# Altium PCB imped50.PcbDoc
Units mm, origin at the board's own origin, x right, y up, seen from the top; angles counter-clockwise.
Board outline 69.9 x 99.85 mm, 4 copper layers (Top Layer, InternalGND, Internal3V3, Bottom Layer), stack 1.563 mm thick; 2 components, 104 nets, 0 pads, 0 vias.
Unrouted connection lines stored in the file: 3.
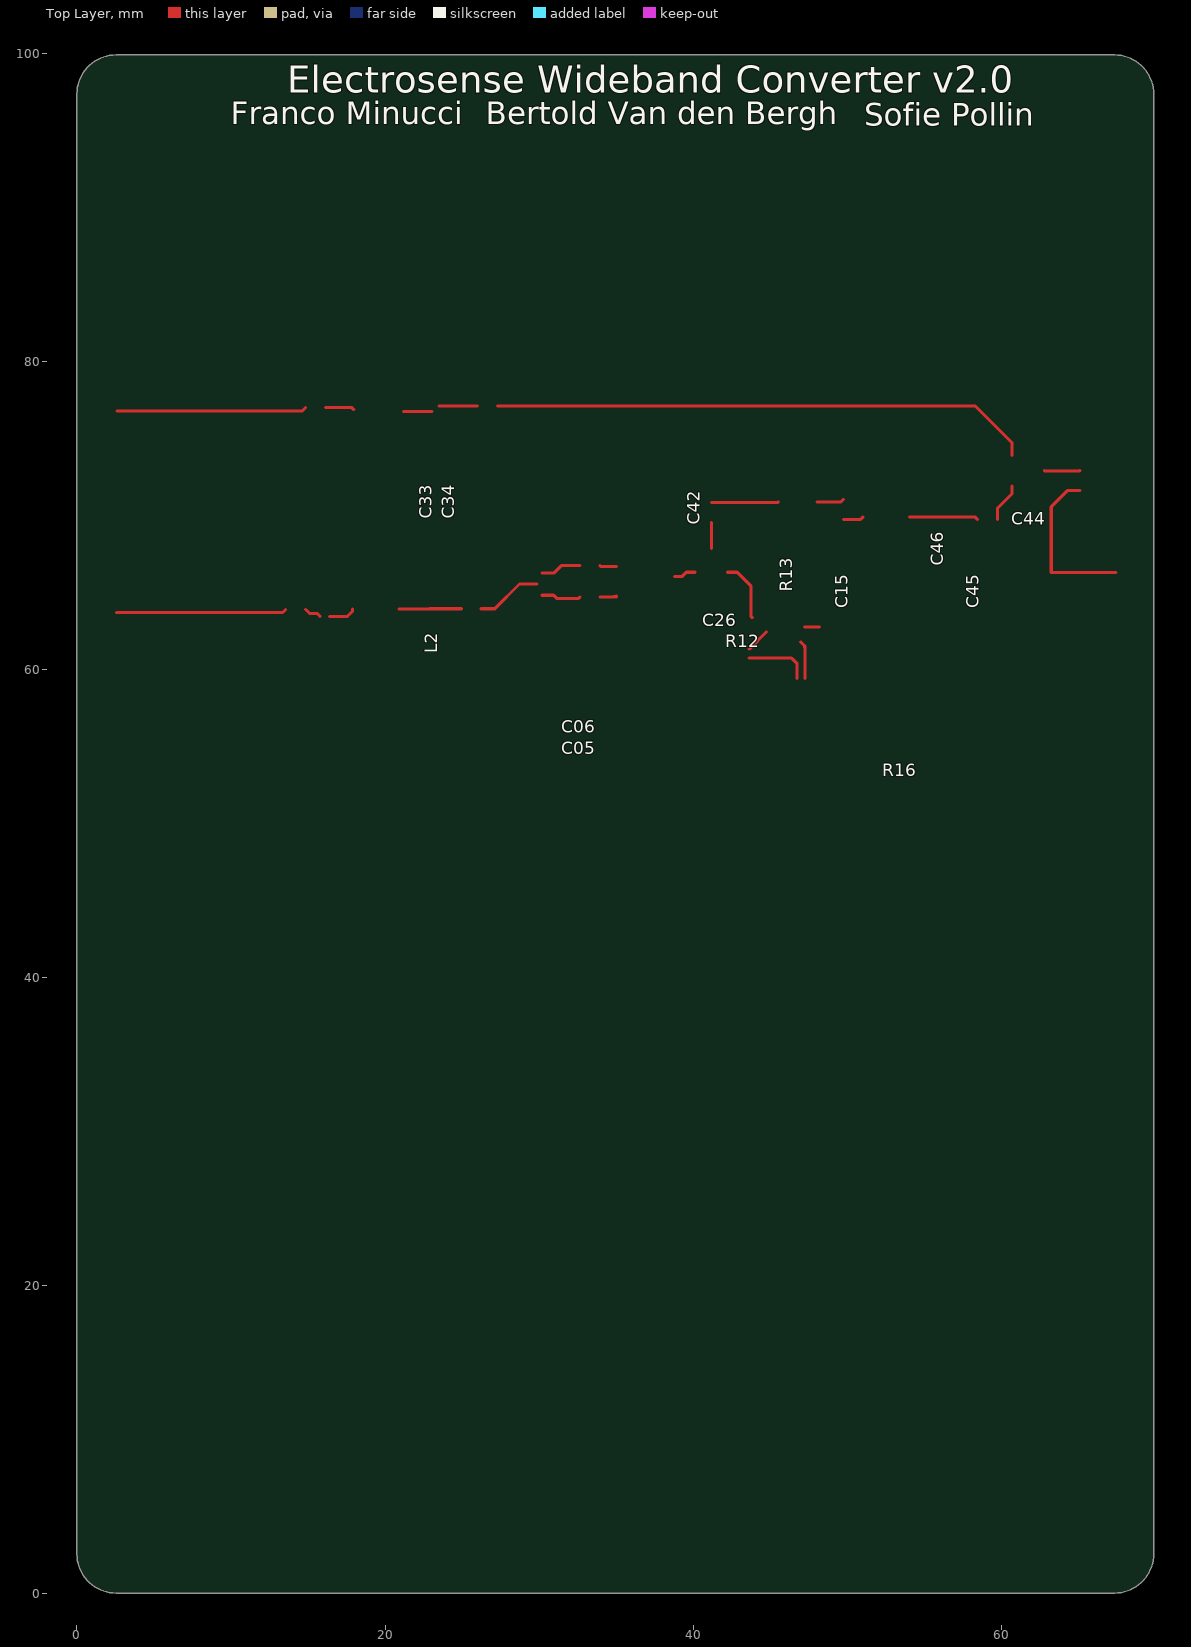
[diagram p0: Top Layer view]
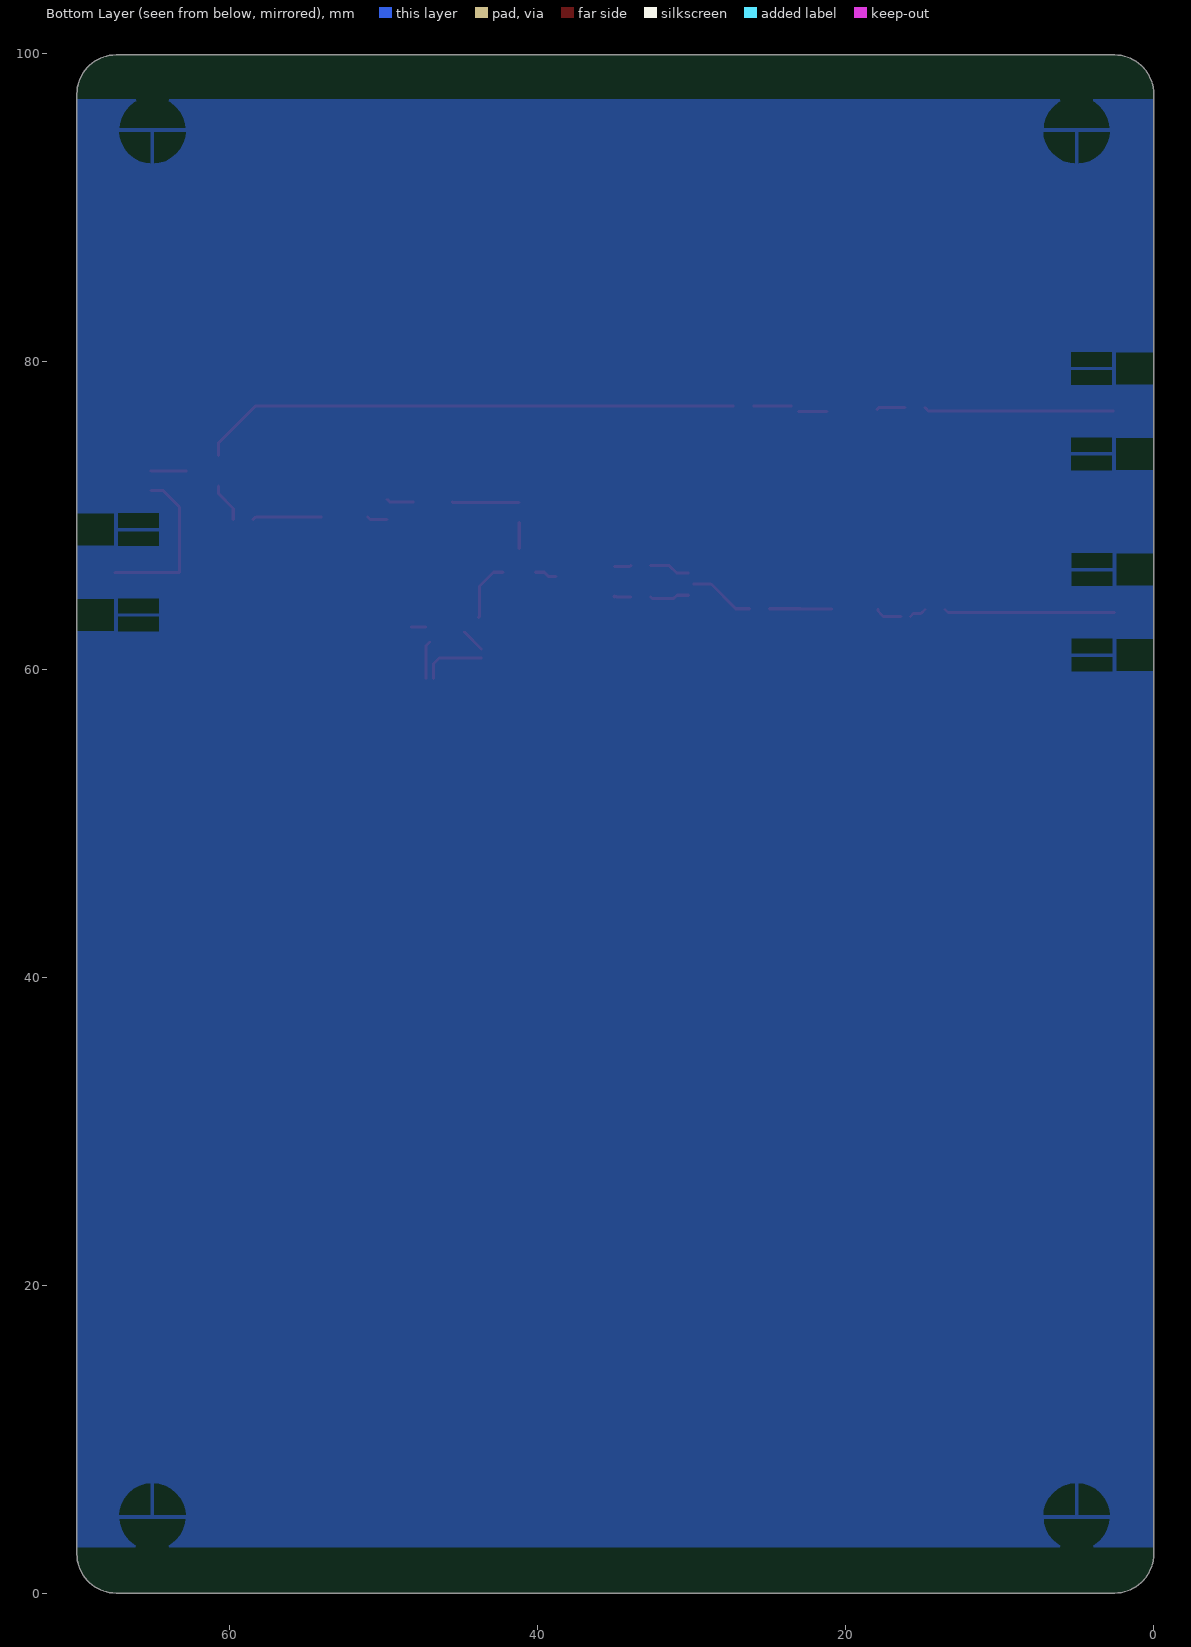
[diagram p1: Bottom Layer view, seen from below]
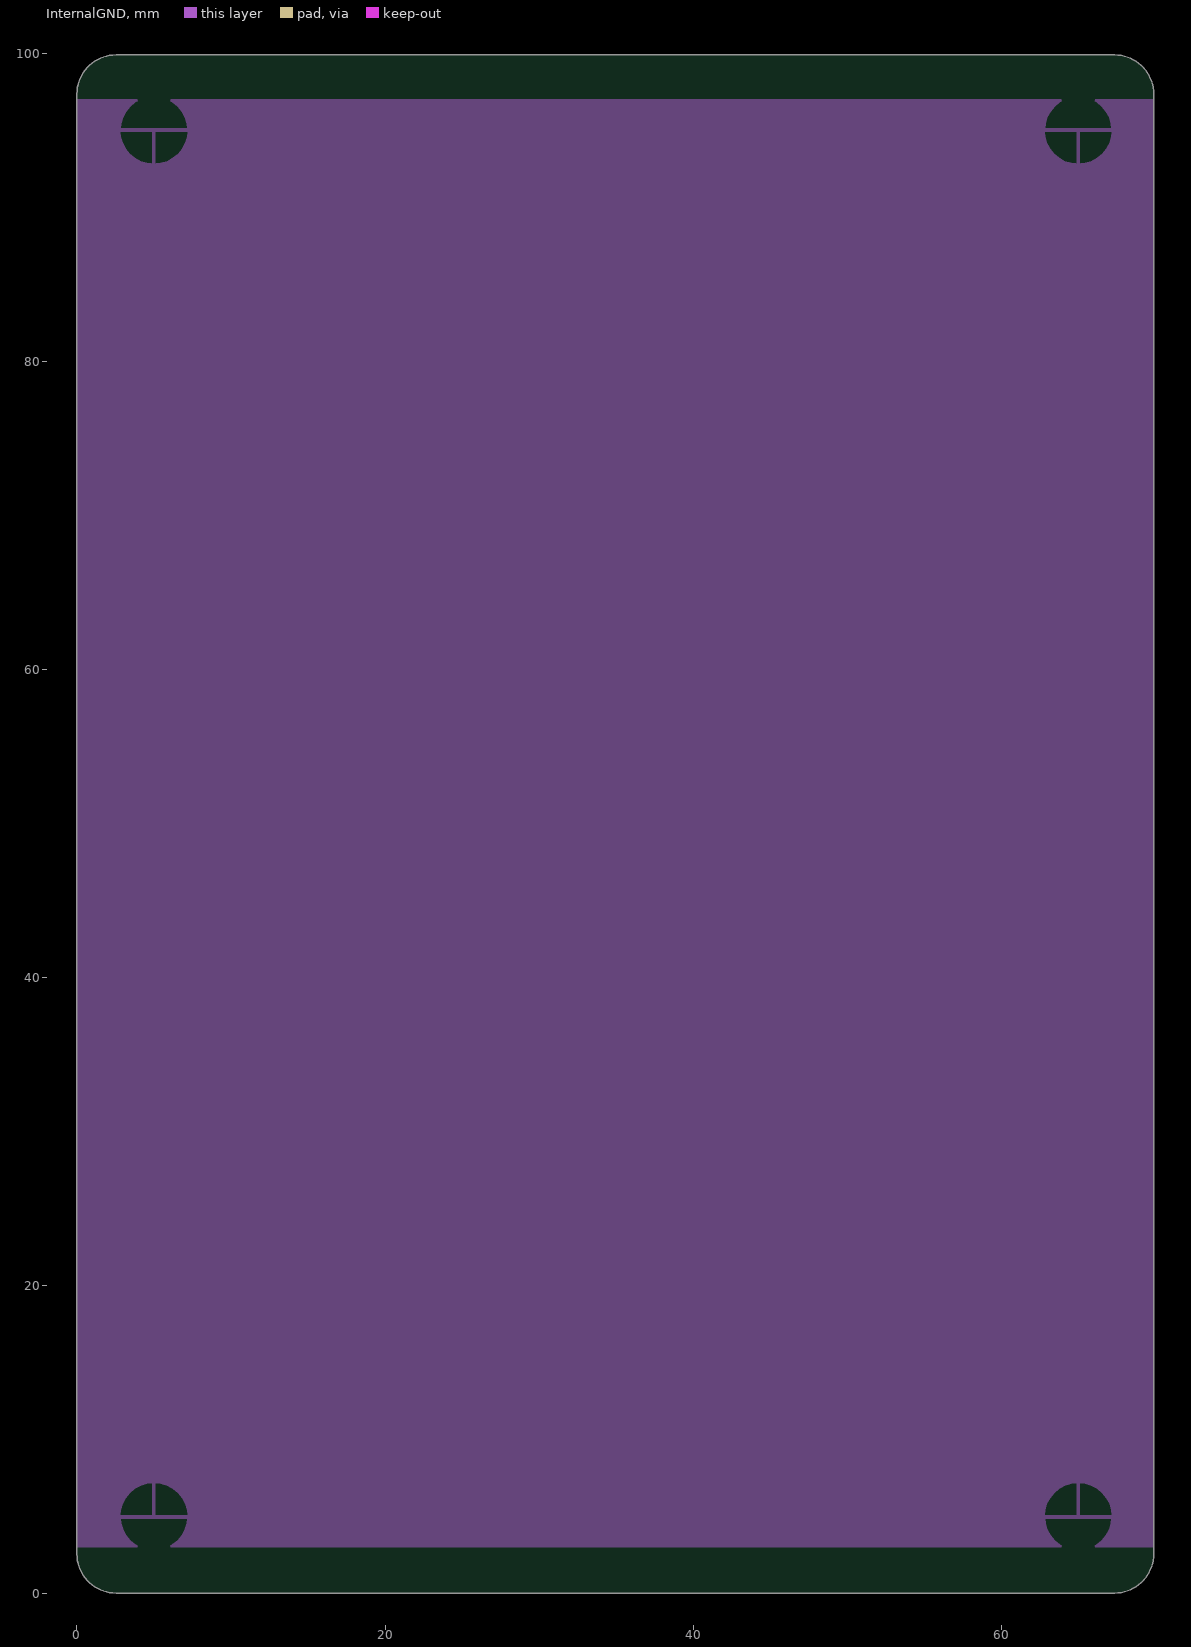
[diagram p2: InternalGND]
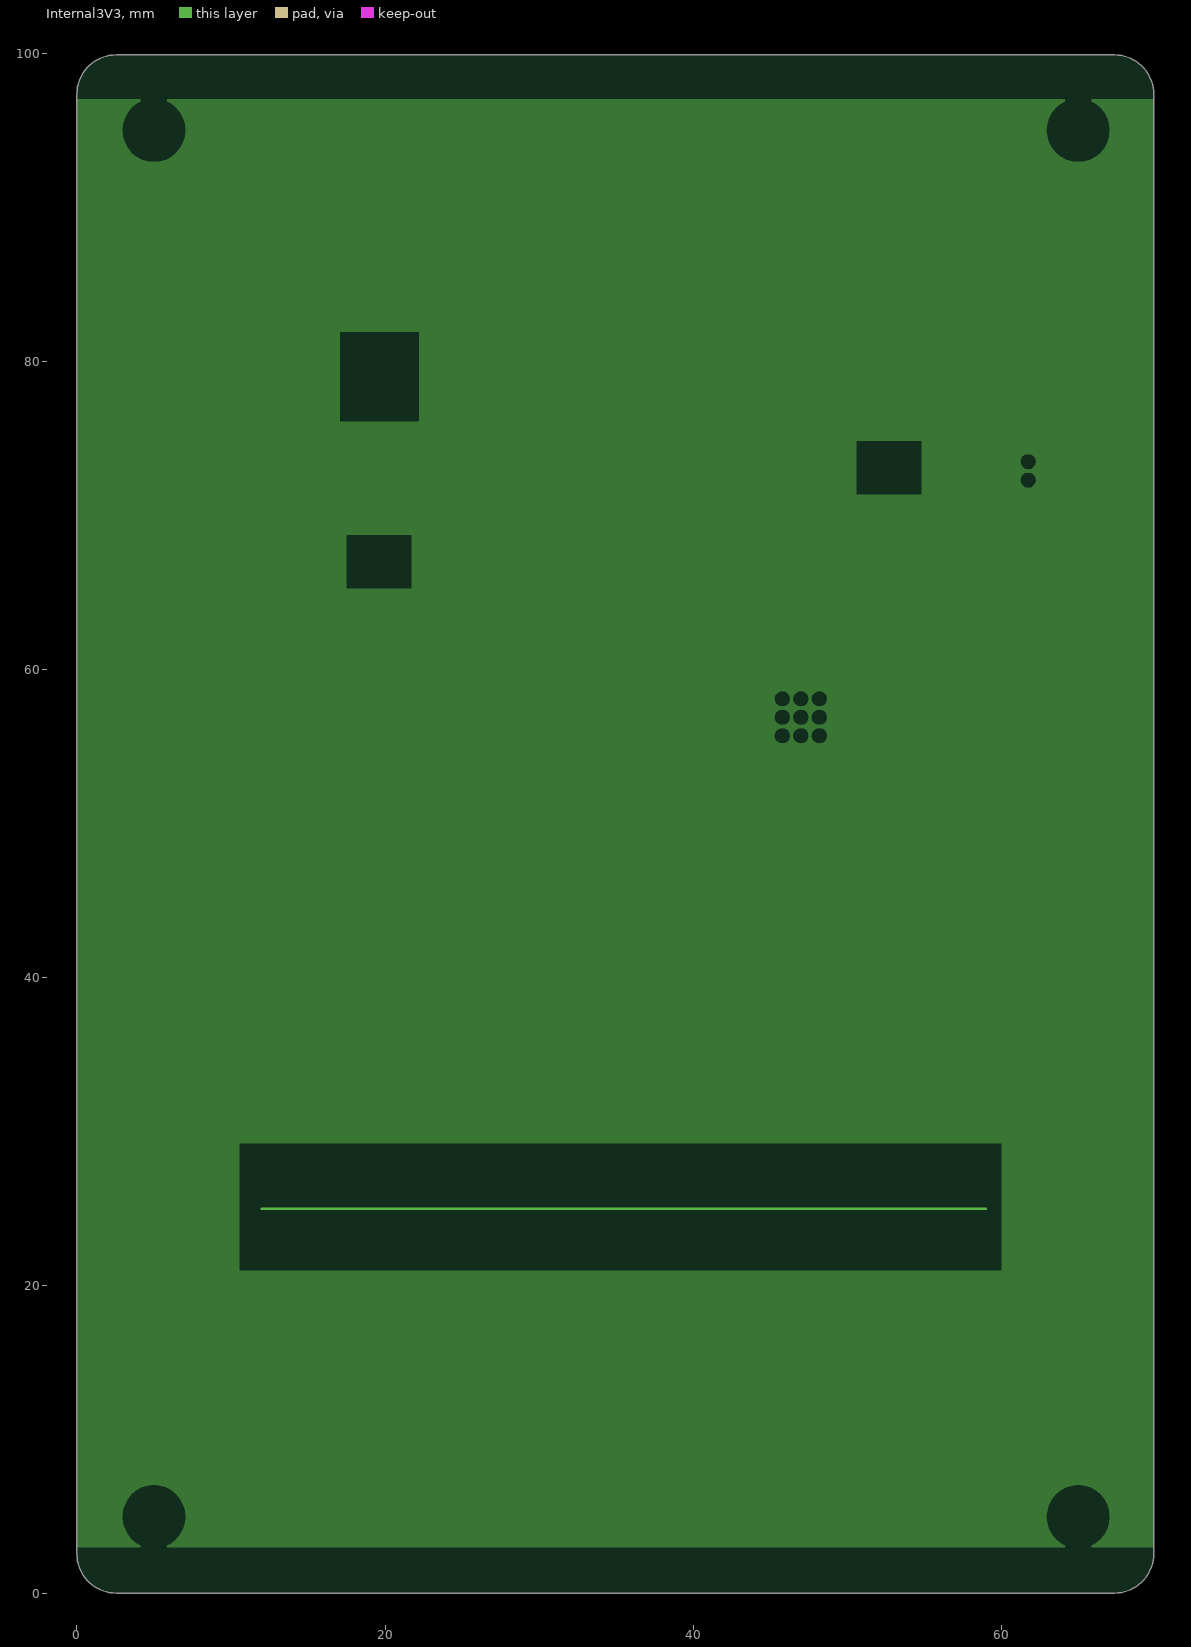
[diagram p3: Internal3V3]

## Layer stack, top to bottom
Top Solder: solder mask 0.0102, Solder Resist, Dk 3.5
Top Layer: signal copper 0.0356
Dielectric1: core 0.11, FR-4, Dk 4.29
InternalGND: signal copper 0.036
Dielectric5: prepreg 1.2, FR-4, Dk 3.96
Internal3V3: signal copper 0.036
Dielectric6: core 0.11, FR-4, Dk 4.29
Bottom Layer: signal copper 0.0356
Bottom Solder: solder mask 0.0102, Solder Resist, Dk 3.5

## Board outline
0,97.349 cw(c2.54,97.349) 2.54,99.889 67.36,99.889 cw(c67.36,97.349) 69.9,97.349 69.9,2.579 cw(c67.36,2.579) 67.36,0.039 2.54,0.039 cw(c2.54,2.579) 0,2.579

## Design rules (kind name [scope] priority, off if disabled: settings)
Clearance Clearance_1 [(InPolygon) vs InNetClass('RF')] p1: gap=0.25 ignorepadtopadclearanceinfootprint=FALSE except(0: Arc-Hole Track-Hole SMDPad-Hole THPad-Hole Via-Hole Fill-Hole Poly-Hole Region-Hole Text-Hole)
Clearance [All] p2: gap=0.15 ignorepadtopadclearanceinfootprint=FALSE except(0: Arc-Hole Track-Hole SMDPad-Hole THPad-Hole Via-Hole Fill-Hole Poly-Hole Region-Hole Text-Hole)
DiffPairsRouting [(InDifferentialPairClass('All Differential Pairs'))] p1: maxlimit=0.254 minlimit=0.254 mostfreqgap=0.254 toplayer_minwidth=0.381 toplayer_maxwidth=0.381 toplayer_prefwidth=0.381 midlayer1_minwidth=0.381 midlayer1_maxwidth=0.381 midlayer1_prefwidth=0.381 midlayer2_minwidth=0.381 midlayer2_maxwidth=0.381 midlayer2_prefwidth=0.381 bottomlayer_minwidth=0.381 bottomlayer_maxwidth=0.381 bottomlayer_prefwidth=0.381 maxuncoupledlength=12.7
HoleSize [All] p1: absolutevalues=TRUE maxlimit=3.5 minlimit=0.025 maxpercent=80.000 minpercent=20.000
MinimumAnnularRing [All] p1: minimumring=0.125
MinimumSolderMaskSliver [All] p1: minsoldermaskwidth=0
PlaneClearance [All] p1: clearance=0.2
PlaneConnect [All] p1: planeconnectstyle=Direct reliefexpansion=0.508 reliefentries=4 reliefconductorwidth=0.254 reliefairgap=0.254
PolygonConnect PolygonConnect_1 [(InPadClass('Direct') or isVia) vs InNet('GND')] p1: connectstyle=Direct reliefconductorwidth=0.254 reliefentries=4 polygonreliefangle="90 Angle" airgapwidth=0.254
PolygonConnect [All] p2: connectstyle=Relief reliefconductorwidth=0.254 reliefentries=4 polygonreliefangle="90 Angle" airgapwidth=0.254
RoutingLayers [All] p1: top layer_v5=TRUE mid layer 1_v5=FALSE mid layer 2_v5=FALSE bottom layer_v5=TRUE
RoutingVias [All] p1: holewidth=0.4 width=0.8 viastyle="Through Hole" minholewidth=0.25 minwidth=0.6 maxholewidth=2 maxwidth=2.5
SilkToSilkClearance [All] p1 off: silktosilkclearance=0.254
SilkToSolderMaskClearance SilkscreenOverComponentPads [IsPad] p1 off: minsilkscreentomaskgap=0.254 clearancetoexposedcopper=TRUE
SolderMaskExpansion [All] p1: expansion=0 istentingtop=FALSE
Width [InNetClass('RF')] p1: maxlimit=0.2 minlimit=0.098 preferedwidth=0.2 toplayer_minwidth=0.2 midlayer1_maxwidth=0.098 midlayer1_prefwidth=0.098 midlayer2_maxwidth=0.098 midlayer2_prefwidth=0.098 bottomlayer_minwidth=0.2 impedanceprofiledriven=TRUE impedanceprofileid={D2337405-BB80-458E-8EDF-B68371DB91AB} impedanceprofilevalue=50.000000 minimp=50.000000 maximp=50.000000 favimp=50.000000
Width Width_1 [All] p2: maxlimit=2.54 minlimit=0.16 preferedwidth=0.254 minimp=50.000000 maximp=50.000000 favimp=50.000000
22 further rules are at their usual default settings.

## Classes and differential pairs
net class RF: DOWNCONV_IN HIGH1 HIGH2 HIGH3 HIGH4 HIGH5 HIGH6 HIGH7 HIGH8 HIGH9 HIGH10 IMG_F_HIGH IMG_F_LOW LO+ LO- MID1 MID2 MID3 MID_IN OUT1 OUT2 RFOUTA+ RFOUTA-
pad class Direct: C70-1 C70-2 C71-1 C71-2 C72-1 C72-2 R30-1 R30-2 R32-1 R32-2 SDR1-1 SDR1-2 SDR1-3 SDR1-4 SDR1-5 U20-1 U20-2 U20-3

## Components (designator, comment, footprint, x,y, rotation, side; value= is the part's Value field where it differs from the comment)
H1 "MOUNTHOLE_3MM" MOUNT_3MM 90.5,34.889 r0 top
H3 "MOUNTHOLE_3MM" MOUNT_3MM 90.5,94.889 r0 top

## Footprints (in the part's own frame and the unit in brackets; to place one, negate y for a bottom-side part, rotate by r counter-clockwise, add the part's x,y. Pads: shape width x height; smd on the part's side, far side on the other; paste and mask are expansions set on the pad)
MOUNT_3MM [mm]

## Nets (pads, with @x,y where several pads share a name; then routed paths per layer and width w, separated by ;. In a path a pad name is that pad's centre, name@x,y a point inside that pad or via, vN(x,y) a via of type N, cw(c..) or ccw(c..) an arc to the next point about the centre after c; other vN are vias at no path point)
3V3: 
3V3RF_L01CPU: 
5V: 
BAND_SEL: 
CE_U1: 
CLK_LED: 
CPU_LOCK_LED: 
CPU_MIX_LED: 
CPU_OSC_IN: 
CPU_OSC_OUT: 
CPU_RX: 
CPU_SCL: 
CPU_SDA: 
CPU_TX: 
CPU_USB_LED: 
CS_PLL: 
CS_U1: 
DOWNCONV_IN:  | length 2.5
  Top Layer w0.2: 59.75,69.739 59.75,70.45 60.7,71.4 60.7,71.889
GND: 
GPS_RST: 
HIGH1:  | length 11.1
  Top Layer w0.2: 2.56,63.7 2.563,63.697 10.9,63.697 11.7,63.697 13.358,63.697 13.55,63.889
HIGH2:  | length 2.9
  Top Layer w0.2: 14.85,63.889 15.1,63.639 15.589,63.639 15.789,63.439 ; 16.4,63.439 17.55,63.439 17.9,63.789 17.9,63.914
HIGH3:  | length 4.1
  Top Layer w0.2: 20.9,63.914 22.875,63.914 22.9,63.939 24.95,63.939
HIGH4:  | length 4.3
  Top Layer w0.2: 26.25,63.939 27.133,63.939 28.733,65.539 29.861,65.539
HIGH5:  | length 1.5
  Top Layer w0.2: 38.787,66.039 39.295,66.039 39.56,66.304 40.136,66.304
HIGH6:  | length 1.7
  Top Layer w0.2: 41.186,67.854 41.186,69.525 41.2,69.539
HIGH7:  | length 4.4
  Top Layer w0.2: 41.2,70.839 45.51,70.839 45.547,70.876
HIGH8:  | length 1.8
  Top Layer w0.2: 48.047,70.876 49.599,70.876 49.761,71.039
HIGH9:  | length 1.3
  Top Layer w0.2: 49.761,69.739 50.872,69.739 51.036,69.903
HIGH10:  | length 4.5
  Top Layer w0.2: 54.036,69.903 58.286,69.903 58.45,69.739
IMG_F_HIGH:  | length 2.6
  Top Layer w0.2: 30.186,64.814 30.948,64.814 31.15,64.612 32.573,64.612 32.65,64.689
IMG_F_LOW:  | length 2.7
  Top Layer w0.2: 30.186,66.264 30.978,66.264 31.448,66.734 32.65,66.734
LO+:  | length 4
  Top Layer w0.2: 42.236,66.304 42.86,66.304 43.77,65.394 43.77,63.426 43.84,63.356
LO-:  | length 1
  Top Layer w0.2: 47.236,62.739 48.2,62.739
MCO: 
MID1:  | length 12.3
  Top Layer w0.2: 2.606,76.764 11.613,76.764 12.413,76.764 14.615,76.764 14.84,76.989
MID2:  | length 1.9
  Top Layer w0.2: 16.14,76.989 17.85,76.989 17.975,76.864
MID3:  | length 4.3
  Top Layer w0.2: 21.2,76.739 23.059,76.739 ; 23.509,77.089 25.989,77.089
MID_IN:  | length 35.2
  Top Layer w0.2: 27.289,77.089 58.329,77.089 60.7,74.718 60.7,73.889
MIX_EN: 
MIX_X2: 
MOSI: 
MOSI_U1: 
MUXOUT_U1: 
NetC06_2: 
NetC20_2: 
NetC21_2: 
NetC22_2: 
NetC23_2: 
NetC24_1: 
NetC33_1: 
NetC54_2: 
NetC55_2: 
NetC56_2: 
NetC57_2: 
NetC59_2: 
NetC60_2: 
NetC61_2: 
NetC65_2: 
NetC67_1: 
NetC68_1: 
NetC68_2: 
NetL5_2: 
NetLOCK_1: 
NetMIX_1: 
NetR01_2: 
NetR02_1: 
NetR08_2: 
NetR10_2: 
OUT1:  | length 2.3
  Top Layer w0.2: 62.819,72.908 62.8,72.889 65.089,72.889 65.1,72.9
OUT2:  | length 10.8
  Top Layer w0.2: 65.1,71.6 64.295,71.6 63.25,70.555 63.25,67.077 63.25,66.277 67.417,66.277 67.44,66.3
PLL_EN: 
PLL_MISO: 
PPS_IN: 
REF_PLL: 
RFOUTA+:  | length 5.8
  Top Layer w0.2: 43.636,60.731 46.394,60.731 46.75,60.375 46.75,59.414 ; 43.636,61.313 44.76,62.436
RFOUTA-:  | length 2.5
  Top Layer w0.2: 46.986,61.779 47.25,61.515 47.25,61.425 ; 47.236,61.439 47.25,61.425 ; 47.25,59.414 47.25,61.425
SCK: 
SMA_SW: 
Stripline:  | length 47
  Internal3V3 w0.16: 12,25 59,25
SW_BYPASS: 
SW_MIX: 
SW_MIX_CPU: 
SW_U1: 
SWCLK: 
SWDIO: 
T2_BASE: 
TUNE: 
U15_INA: 
U15_INB: 
U15_OSCB: 
U15_OSCB_FILTERED: 
U15_OUTA: 
U15_OUTB: 
UPCONV_EN#: 
UPCONV_IN: 
URFSW_J1:  | length 1.1
  Top Layer w0.2: 33.95,64.689 34.823,64.689 34.874,64.739 35.011,64.739
  Top Layer w0.25: 34.986,64.714 35.011,64.739
URFSW_J2:  | length 1.1
  Top Layer w0.2: 33.95,66.734 33.994,66.689 35.013,66.689
USB_D+: 
USB_D+_CON: 
USB_D-: 
USB_D-_CON: 
USB_EN: 
X1_OUT: 

## Polygon pours and split planes (outlines as drawn)
GND on Bottom Layer "GND_L04_P001" (solid, pour order 1): 0,97 69.9,97 69.9,3 0,3
GND on InternalGND "GND_L02_P002" (solid, pour order 2): 0,97 69.9,97 69.9,3 0,3
3V3 on Internal3V3 "3V3_L03_P003" (solid, pour order 3): 0,97 69.9,97 69.9,3 0,3

## Other copper
Internal3V3:
  pour cut-out: 54.809,74.8 54.809,71.381 50.631,71.381 50.612,71.4 50.612,74.8
  pour cut-out: 21.7,68.7 21.7,65.281 17.522,65.281 17.503,65.3 17.503,68.7
  pour cut-out: 17.1,81.9 22.2,81.9 22.2,76.1 17.1,76.1
  pour cut-out: 10.559,29.2 60,29.2 60,21 10.559,21

## Silkscreen, mask and mechanical layers (free items; w line width, h text height)
Top Overlay:
  text "Electrosense Wideband Converter v2.0" at 13.65,96.839 h3
  text "Franco Minucci" at 10,94.907 h2.5
  text "Bertold Van den Bergh" at 26.55,94.907 h2.5
  text "Sofie Pollin" at 51.1,94.789 h2.5
  text "C33" at 23.046,69.779 h0.8 r90
  text "C34" at 24.496,69.779 h0.8 r90
  text "C42" at 40.446,69.38 h0.8 r90
  text "C44" at 60.654,69.38 h0.8
  text "C46" at 56.229,66.738 h0.8 r90
  text "R13" at 46.446,65.054 h0.8 r90
  text "C15" at 50.046,63.954 h0.8 r90
  text "C45" at 58.546,63.954 h0.8 r90
  text "C26" at 40.584,62.785 h0.8
  text "R12" at 42.096,61.435 h0.8
  text "L2" at 23.405,61.043 h0.8 r90
  text "C06" at 31.454,55.873 h0.8
  text "C05" at 31.454,54.493 h0.8
  text "R16" at 52.29,53.054 h0.8
Top Paste:
  rectangle: 17.35,65.189 21.425,68.839
  rectangle: 50.486,71.178 54.561,74.828
Top Solder:
  rectangle: 17.35,65.189 21.425,68.839
  rectangle: 50.486,71.178 54.561,74.828
Outline:
  lines w0.05: 0,2.595 0.001,97.294 cw(c2.596,97.294) 2.596,99.889 67.305,99.889 cw(c67.305,97.294) 69.9,97.294 69.9,2.615 cw(c67.305,2.615) 67.305,0.02 2.596,0.04 cw(c2.596,2.635) 0.001,2.635 ; 32.913,65.139 ccw(c32.913,67.734) 35.508,67.734